# Altium PCB HVP012A.PcbDoc (part 1 of 3)
Units mil, origin at the board's own origin, x right, y up, seen from the top; angles counter-clockwise.
Board outline 2249 x 2178 mil, 4 copper layers (Top Layer, MidLayer1, MidLayer2, Bottom Layer), stack 61.2 mil thick; 91 components, 29 nets, 189 pads, 191 vias.
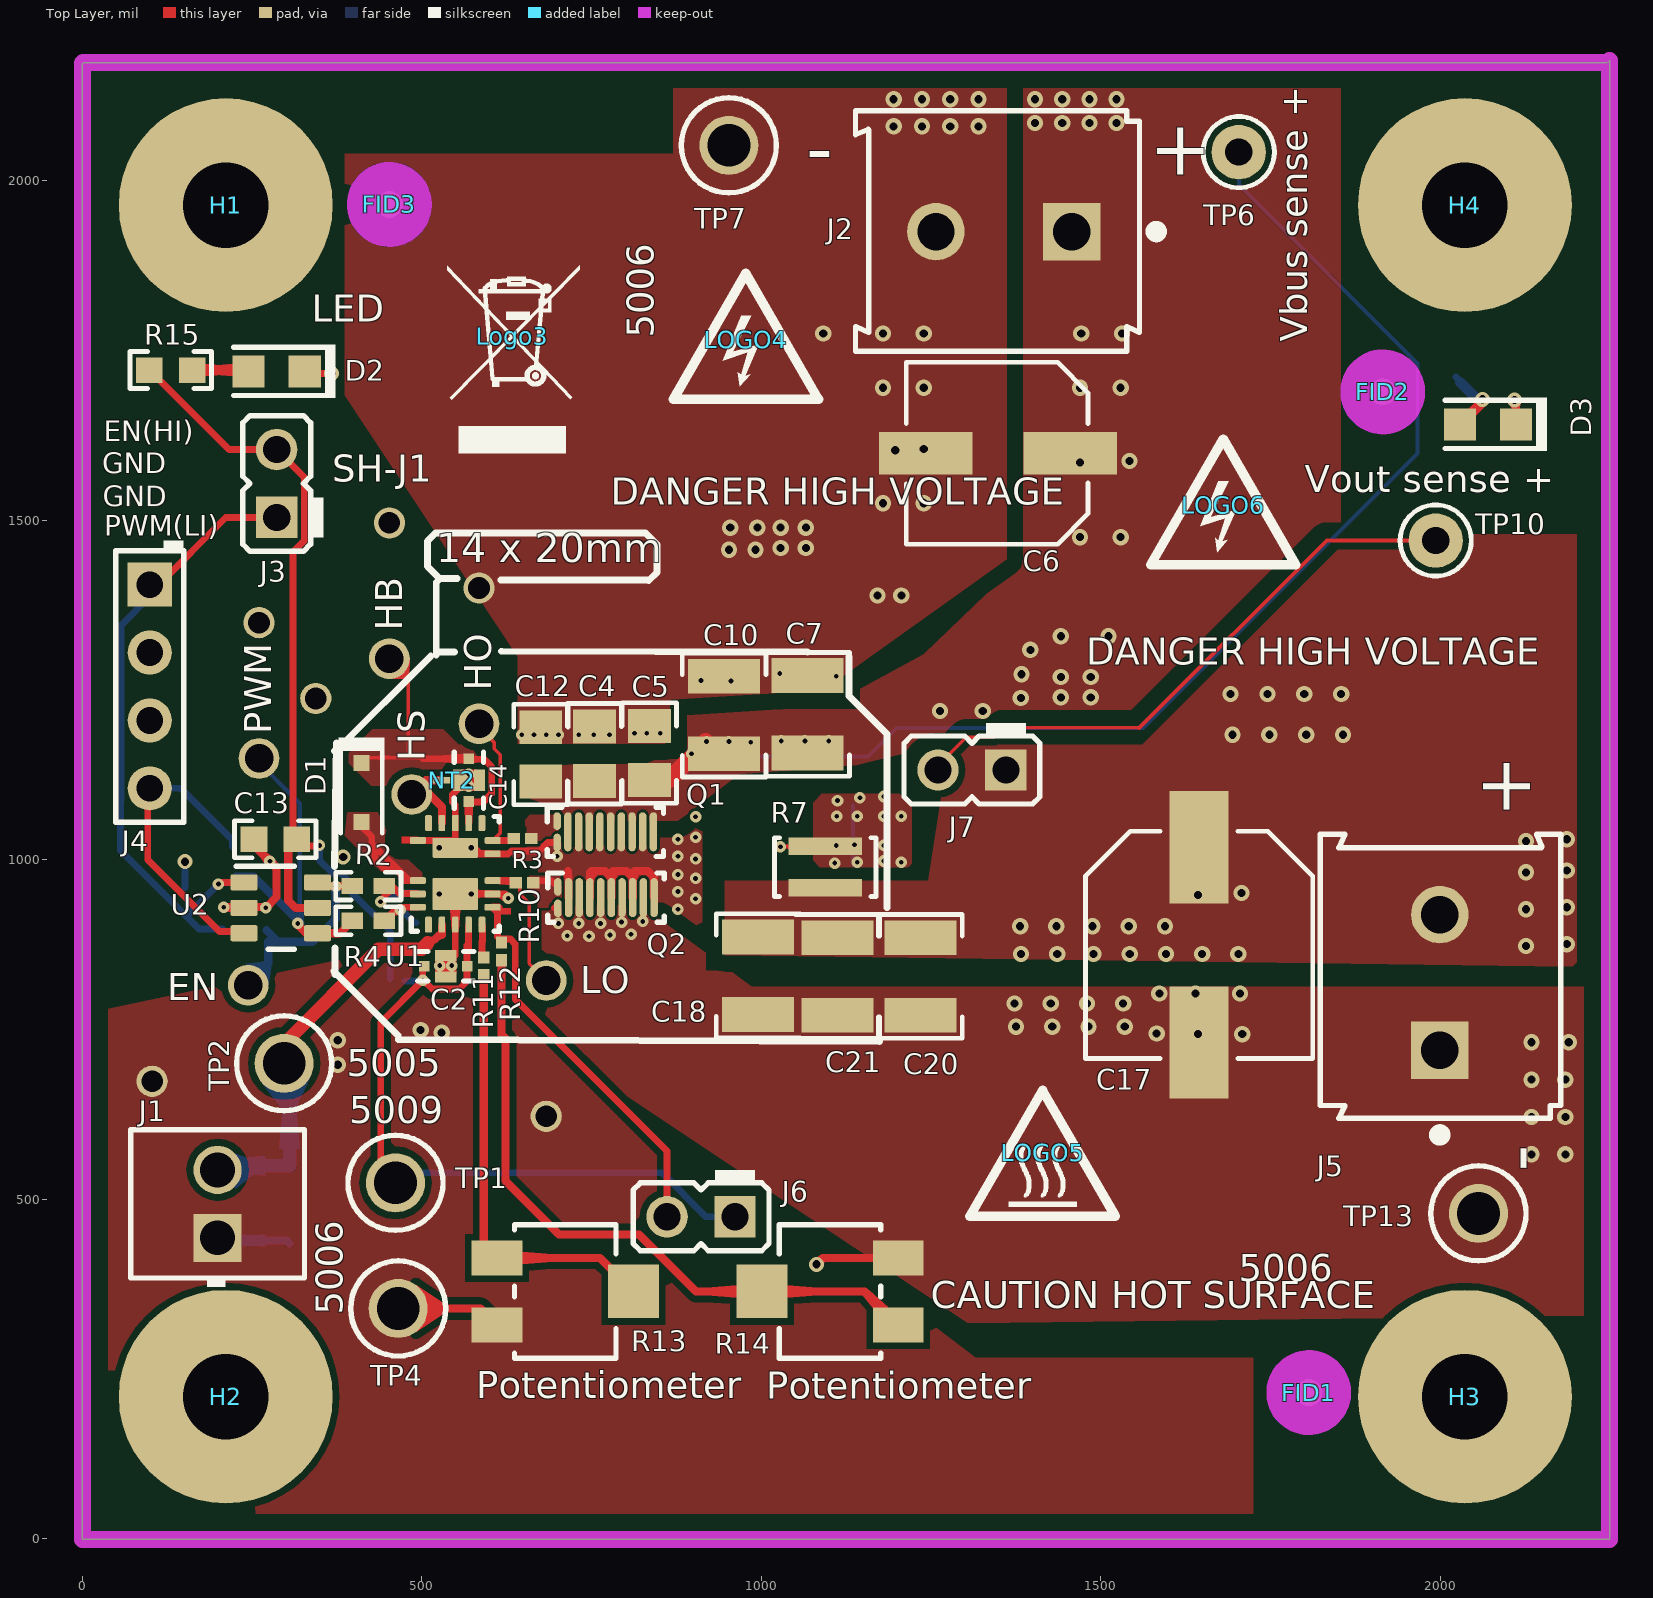
[diagram p0: Top Layer view]
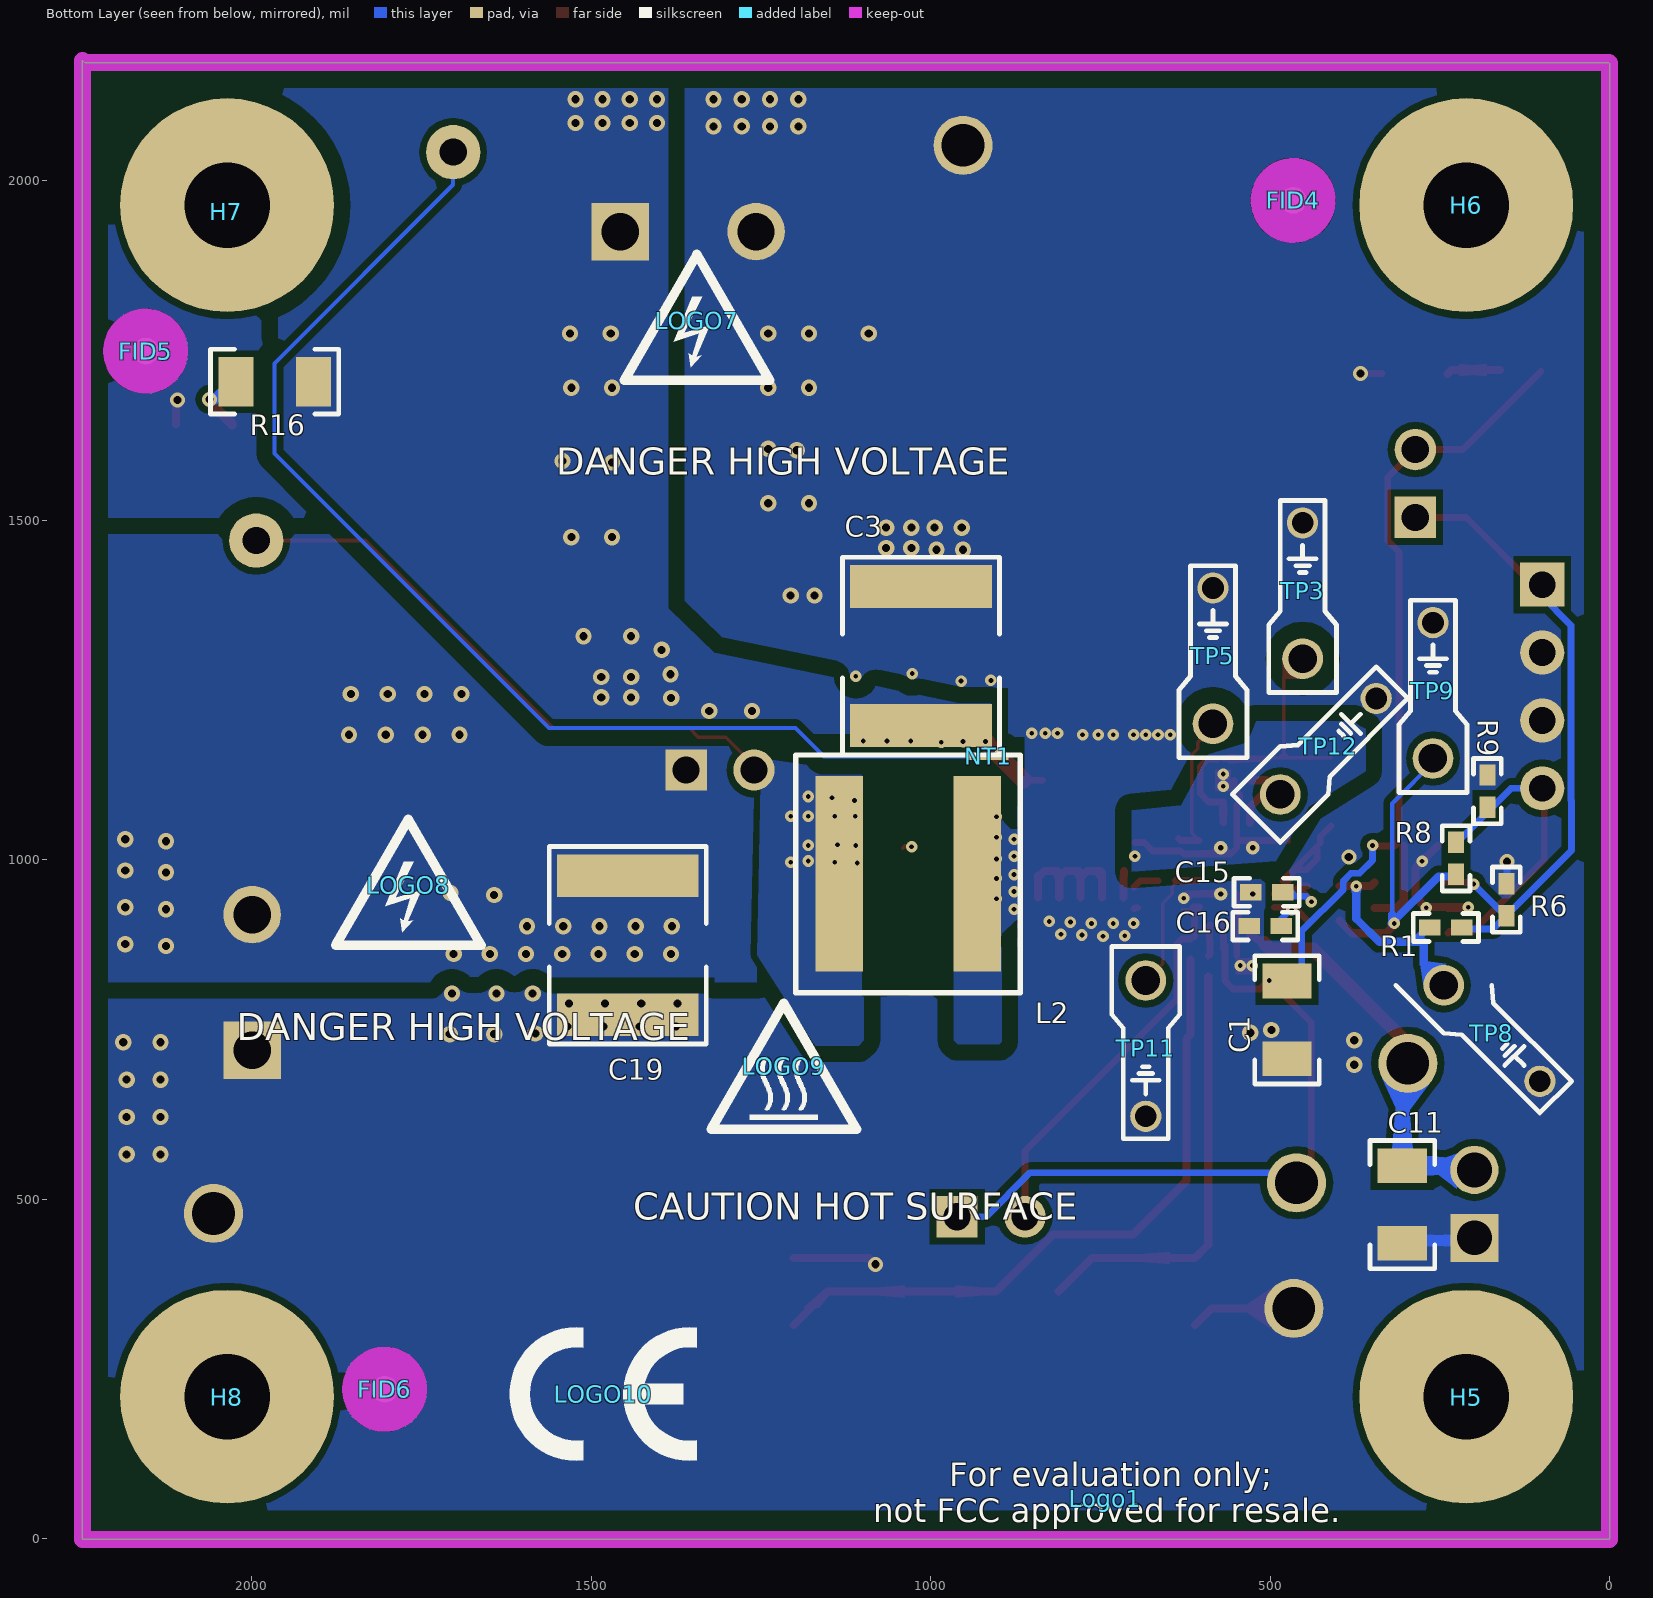
[diagram p1: Bottom Layer view, seen from below]
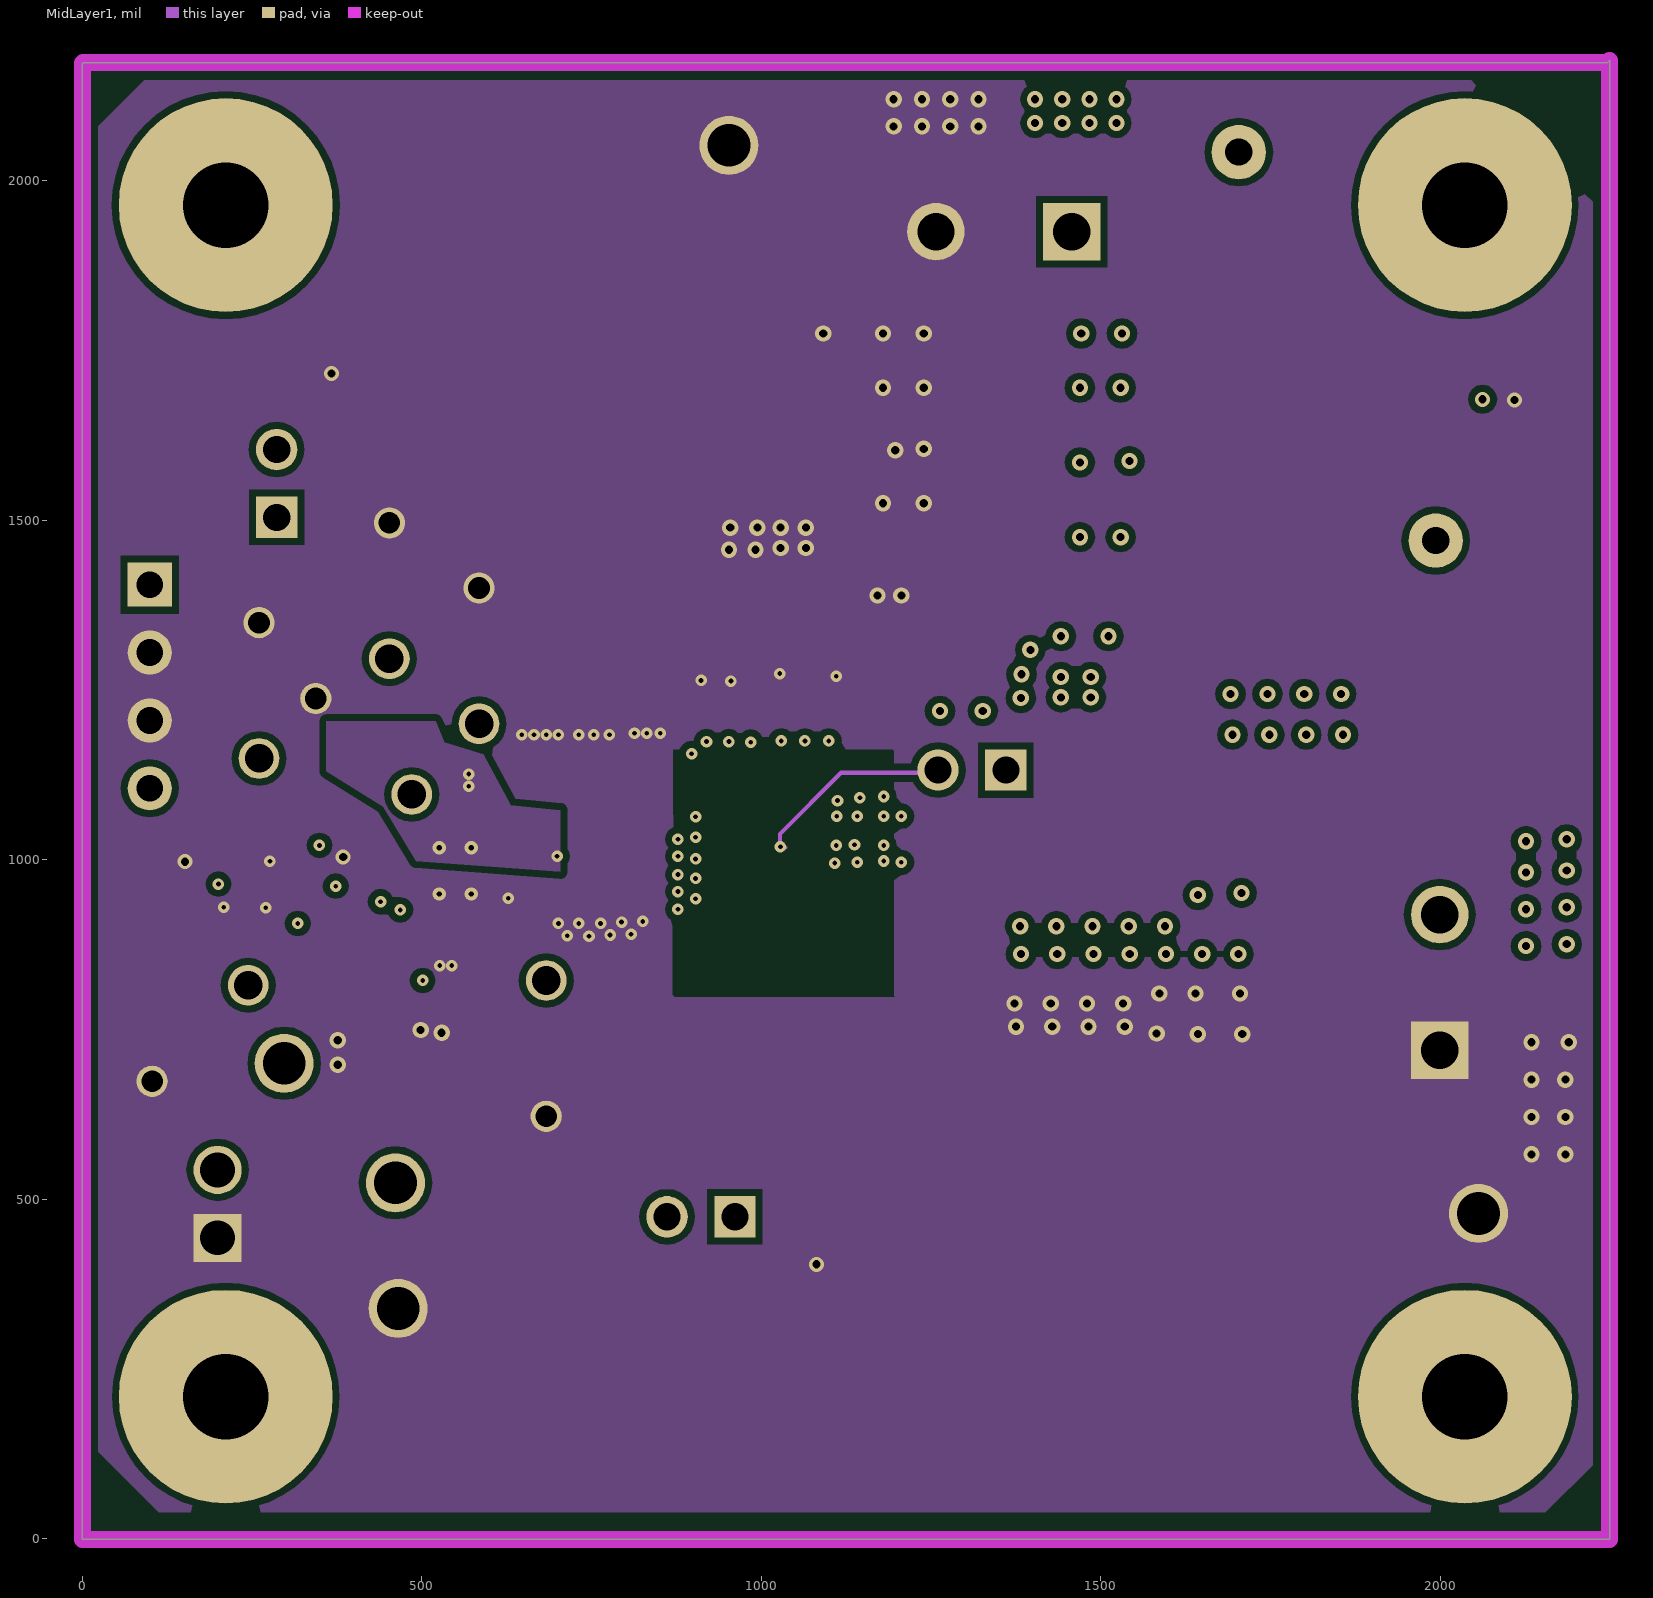
[diagram p2: MidLayer1]
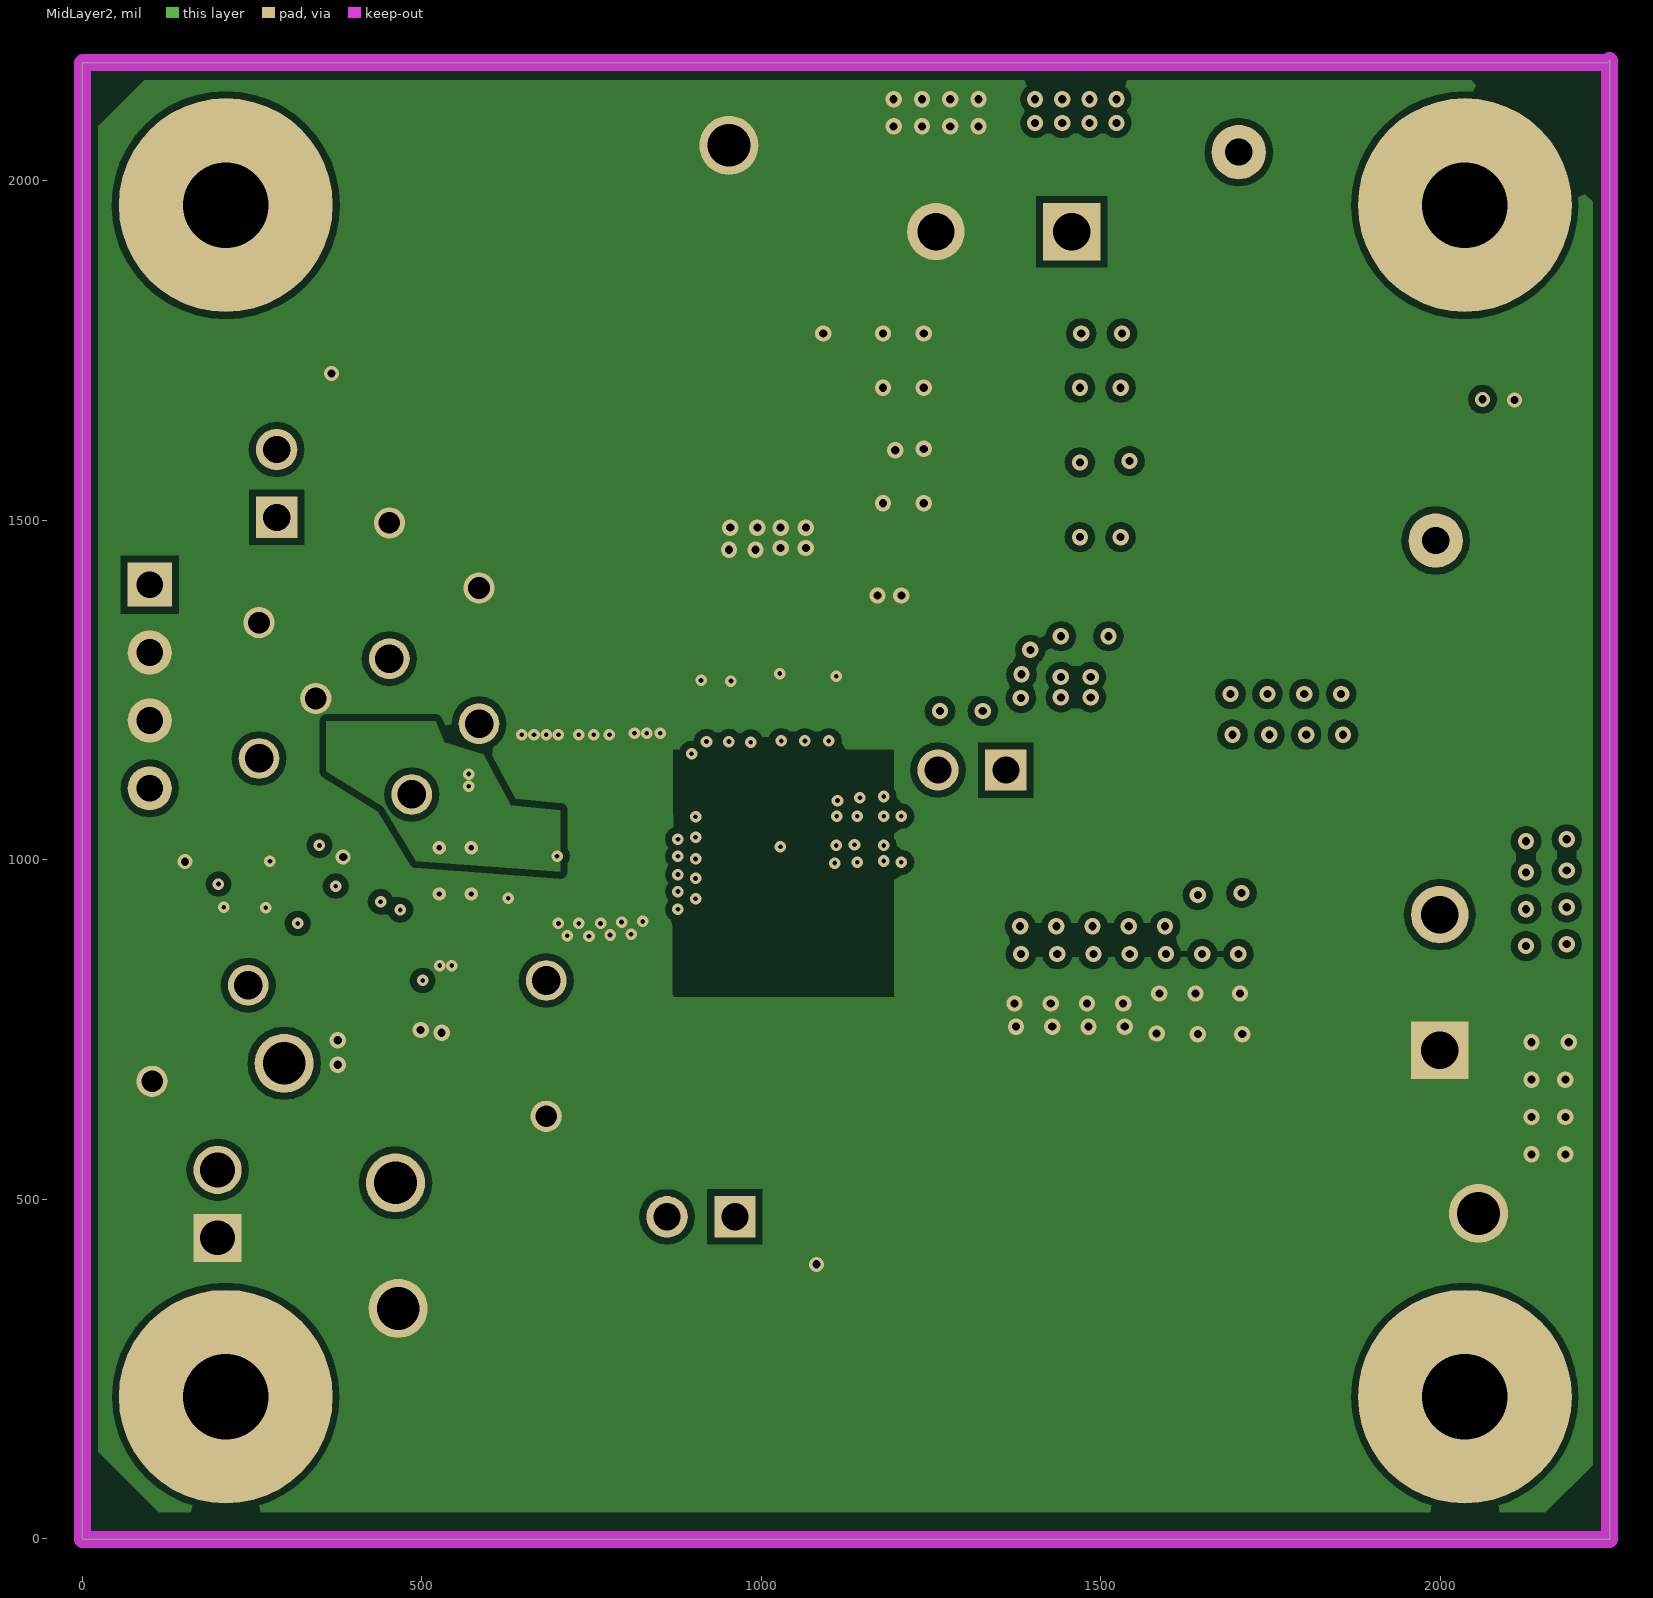
[diagram p3: MidLayer2]

## Layer stack, top to bottom
Top Solder: solder mask 0.4, Solder Resist, Dk 3.5
Top Layer: signal copper 2.8
Dielectric1: core 5, FR-4, Dk 4.2
MidLayer1: signal copper 2.8
Dielectric2: core 40, FR-4, Dk 4.2
MidLayer2: signal copper 2.8
Dielectric 3: prepreg 5, Dk 4.2
Bottom Layer: signal copper 2.8
Bottom Solder: solder mask 0.4, Solder Resist, Dk 3.5

## Board outline
0,-1 0,2173 1,2174 2246,2174 2249,2177 2249,-1

## Design rules (kind name [scope] priority, off if disabled: settings)
AcuteAngle [All] p1: minimum=3.20000000000000E+0001 checktracksonly=FALSE
AssemblyTestPointUsage [All] p1: valid=2
Clearance Fiducials [HasFootprint('Fiducial10-30')] p1: gap=0 ignorepadtopadclearanceinfootprint=FALSE
Clearance "inner layer clearance" [OnLayer('MidLayer1')or OnLayer('MidLayer2')] p2: gap=10 ignorepadtopadclearanceinfootprint=FALSE except(0: Arc-Hole Track-Hole SMDPad-Hole THPad-Hole Via-Hole Fill-Hole Poly-Hole Region-Hole Text-Hole)
Clearance Clearance_BoardEdge_Poly [OnCopper and InPoly vs IsKeepOut] p3: gap=25 ignorepadtopadclearanceinfootprint=FALSE except(0: Arc-Hole Track-Hole SMDPad-Hole THPad-Hole Via-Hole Fill-Hole Poly-Hole Region-Hole Text-Hole)
Clearance Clearance_BoardEdge [OnCopper and Not InComponentClass('Logo') and not InComponentClass('FiducialMark') and not InRegion(1000,500,4000,800) and Not OnLayer('Keepout') vs OnLayer('Keepout')] p4: gap=60 ignorepadtopadclearanceinfootprint=FALSE except(0: Arc-Hole Track-Hole SMDPad-Hole THPad-Hole Via-Hole Fill-Hole Poly-Hole Region-Hole Text-Hole)
Clearance Clearance_BoardEdge_MountingHoles [OnCopper and InComponentClass('Mounting Holes') vs IsKeepOut] p5: gap=40 ignorepadtopadclearanceinfootprint=FALSE except(0: Arc-Hole Track-Hole SMDPad-Hole THPad-Hole Via-Hole Fill-Hole Poly-Hole Region-Hole Text-Hole)
Clearance "FET pads clearance" [All vs WithinRoom('FETs')] p6: gap=4 ignorepadtopadclearanceinfootprint=FALSE except(0: Arc-Hole Track-Hole SMDPad-Hole THPad-Hole Via-Hole Fill-Hole Poly-Hole Region-Hole Text-Hole)
Clearance SW [InNetClass('SW') vs not InNetClass('SW')] p7: gap=24 ignorepadtopadclearanceinfootprint=FALSE except(0: Arc-Hole Track-Hole SMDPad-Hole THPad-Hole Via-Hole Fill-Hole Poly-Hole Region-Hole Text-Hole)
Clearance HV [InNetClass('HV') vs not InNetClass('HV')] p8: gap=24 ignorepadtopadclearanceinfootprint=FALSE except(0: Arc-Hole Track-Hole SMDPad-Hole THPad-Hole Via-Hole Fill-Hole Poly-Hole Region-Hole Text-Hole)
Clearance HV2 [InNetClass('HV2') vs not InNetClass('HV2')] p9: gap=24 ignorepadtopadclearanceinfootprint=FALSE except(0: Arc-Hole Track-Hole SMDPad-Hole THPad-Hole Via-Hole Fill-Hole Poly-Hole Region-Hole Text-Hole)
Clearance Clearance_Poly [InPolygon] p10: gap=10 ignorepadtopadclearanceinfootprint=FALSE except(0: Arc-Hole Track-Hole SMDPad-Hole THPad-Hole Via-Hole Fill-Hole Poly-Hole Region-Hole Text-Hole)
Clearance Clearance_1 [All] p11: gap=5 ignorepadtopadclearanceinfootprint=FALSE except(0: Arc-Hole Track-Hole SMDPad-Hole THPad-Hole Via-Hole Fill-Hole Poly-Hole Region-Hole Text-Hole)
ComponentClearance [InComponent('SH-J1')] p1: gap=0 collisioncheckmode=3 verticalgap=0 showdistances=FALSE
ComponentClearance "Schematic ComponentClearance1" [InComponent('NT1')] p2: gap=0 collisioncheckmode=3 verticalgap=0 showdistances=FALSE
ComponentClearance "Schematic ComponentClearance2" [InComponent('NT2')] p3: gap=0 collisioncheckmode=3 verticalgap=0 showdistances=FALSE
ComponentClearance ComponentClearance_ScrewToNut [(HasFootprint('NY PMS 440 0025 PH')) vs (HasFootprint('Keystone_1902C'))] p4: gap=0 collisioncheckmode=3 verticalgap=0 showdistances=FALSE
ComponentClearance ComponentClearance_testpoint [(HasFootprint('TESTPOINT_PIGTAIL'))] p5: gap=0 collisioncheckmode=3 verticalgap=0 showdistances=FALSE
ComponentClearance not_comp_1 [WithinRoom('not_comp')] p6: gap=0 collisioncheckmode=3 verticalgap=0 showdistances=FALSE
ComponentClearance ComponentClearance_1 [All] p7: gap=10 collisioncheckmode=3 verticalgap=10 showdistances=FALSE
ComponentClearance ComponentClearance_Shunt [InComponentClass('Header') vs InComponentClass('Shunt')] p8: gap=0 collisioncheckmode=3 verticalgap=0 showdistances=FALSE
ComponentClearance ComponentClearance_Logo [InComponentClass('Logo')] p9: gap=50 collisioncheckmode=3 verticalgap=10 showdistances=FALSE
ComponentClearance ComponentClearance_MountingHoles [InComponentClass('Mounting Holes')] p10: gap=0 collisioncheckmode=3 verticalgap=100000 showdistances=FALSE
ComponentClearance ComponentClearance_SmallPassives [HasFootprint('0201*') or HasFootprint('0402*') or HasFootprint('0508') or HasFootprint('0603*') or HasFootprint('0612') or HasFootprint('0805*') or HasFootprint('0815*') or HasFootprint('0830*') or HasFootprint('1206*') or HasFootprint('1210*') or HasFootprint('1808*') or HasFootprint('1812*') or HasFootprint('1825*') or HasFootprint('2010*') or HasFootprint('2220*') or HasFootprint('2225*') or HasFootprint('2512*') or HasFootprint('2728*') or HasFootprint('3518*') vs HasFootprint('0201*') or HasFootprint('0402*') or HasFootprint('0508') or HasFootprint('0603*') or HasFootprint('0612') or HasFootprint('0805*') or HasFootprint('0815*') or HasFootprint('0830*') or HasFootprint('1206*') or HasFootprint('1210*') or HasFootprint('1808*') or HasFootprint('1812*') or HasFootprint('1825*') or HasFootprint('2010*') or HasFootprint('2220*') or HasFootprint('2225*') or HasFootprint('2512*') or HasFootprint('2728*') or HasFootprint('3518*')] p11: gap=5 collisioncheckmode=3 verticalgap=10 showdistances=FALSE
ComponentClearance ComponentClearance_THtoSMT [IsThruComponent vs IsSMTComponent] p12: gap=40 collisioncheckmode=3 verticalgap=30 showdistances=FALSE
ComponentClearance ComponentClearance_THtoTH [IsThruComponent vs IsThruComponent] p13: gap=118.11 collisioncheckmode=3 verticalgap=30 showdistances=FALSE
DiffPairsRouting [All] p1: maxlimit=100 minlimit=10 mostfreqgap=10 toplayer_minwidth=15 toplayer_maxwidth=15 toplayer_prefwidth=15 midlayer1_minwidth=15 midlayer1_maxwidth=15 midlayer1_prefwidth=15 midlayer2_minwidth=15 midlayer2_maxwidth=15 midlayer2_prefwidth=15 bottomlayer_minwidth=15 bottomlayer_maxwidth=15 bottomlayer_prefwidth=15 maxuncoupledlength=1000
FabricationTestPointUsage TestPointUsage [All] p1: valid=2 allowmultiple=FALSE
FabricationTestpoint Testpoint [All] p1: side=3 testpointundercomponent=TRUE minsize=40 maxsize=100 preferedsize=60 minholesize=0 maxholesize=40 preferedholesize=32 testpointgrid=1 allowsidetop=TRUE allowsidebottom=TRUE usegrid=TRUE gridtolerance=0.01
FanoutControl Fanout_LCC [IsLCC] p1: bgadir=Out bgaviamode=Centered fanoutstyle=Auto fanoutdirection=Alternating viagrid=1 // Fanout_LCC (Default Rule)
FanoutControl Fanout_BGA [IsBGA] p2: bgadir=Out bgaviamode=Centered fanoutstyle=Auto fanoutdirection=Alternating viagrid=1 // Fanout_BGA (Default Rule)
FanoutControl Fanout_Default [All] p4: bgadir=Out bgaviamode=Centered fanoutstyle=Auto fanoutdirection=Alternating viagrid=1 // Fanout_Default (Default Rule)
FanoutControl Fanout_Small [(CompPinCount < 5)] p5: bgadir=Out bgaviamode=Centered fanoutstyle=Auto fanoutdirection=OutThenIn viagrid=1 // Fanout_Small (Default Rule)
HoleSize [All] p1: absolutevalues=TRUE maxlimit=251 minlimit=7 maxpercent=80.000 minpercent=20.000
HoleToHoleClearance [All] p1: gap=6 allowstackedmicrovias=TRUE
MinimumAnnularRing MinimumAnnularRing_ThermalPadVias [IsVia and InAnyComponent] p1: minimumring=5
MinimumAnnularRing [All] p2: minimumring=5
MinimumSolderMaskSliver MinimumSolderMaskSliver_Logo [InComponentClass('Logo') vs InComponentClass('Logo')] p1: minsoldermaskwidth=0.7
MinimumSolderMaskSliver [All] p2: minsoldermaskwidth=1
PlaneConnect [All] p1: planeconnectstyle=Direct reliefexpansion=10 reliefentries=4 reliefconductorwidth=10 reliefairgap=10
PolygonConnect [All] p1: connectstyle=Direct reliefconductorwidth=10 reliefentries=4 polygonreliefangle="90 Angle" airgapwidth=10
RoomDefinition FETs [InComponent('No Component')] p1: confinementstyle=ConfineIn formatcopy=TRUE lockcomponents=FALSE outline 636,1077 646,1077 646,873 921,873 921,1076
RoutingVias ThermalPadVias [IsVia and InAnyComponent] p1: holewidth=7.87 width=19.68 viastyle="Through Hole" minholewidth=7 minwidth=19.68 maxholewidth=12.99 maxwidth=23.62
RoutingVias [All] p2: holewidth=16 width=18 viastyle="Through Hole" minholewidth=6.99 minwidth=13 maxholewidth=40 maxwidth=65
SMDToCorner [All] p1: distance=30000
SilkToSilkClearance [All] p1: silktosilkclearance=2
SilkToSolderMaskClearance SilkscreenOverComponentPads [IsPad] p1: minsilkscreentomaskgap=2 clearancetoexposedcopper=TRUE
SolderMaskExpansion [All] p1: expansion=1.97
Width [All] p1: maxlimit=200 minlimit=3 preferedwidth=6 checkconnectedcopper=TRUE
15 further rules are at their usual default settings.

## Classes and differential pairs
net class HV: K_VIN VIN
net class SW: 11 15 HB2 HGATE HO HS2 NetNT2_1
net class HV2: NetJ7_2 VOUT

## Components (designator, comment, footprint, x,y, rotation, side; value= is the part's Value field where it differs from the comment)
C1 "Capacitor" 1206 475,764 r270 bottom value=10uF
C2 "Capacitor_Balanced" YFF18PW 535,843 r0 top value=0.47uF
C3 "Capacitor" 2220_200 1014,1300 r90 bottom value=1uF
C4 "Capacitor" 0805_HV 754,1156 r90 top value=0.022uF
C5 "Capacitor" 0805_HV 835,1157 r90 top value=0.022uF
C6 "Cap_Polarized" CAPSMT_62_F60 1349,1599 r180 top value=22uF
C7 "Capacitor" 1210_220 1068,1214 r90 top value=0.22uF
C10 "Capacitor" 1210_220 945,1213 r90 top value=0.22uF
C11 "Capacitor" 1206 305,492 r90 bottom value=10uF
C12 "Capacitor" 0805_HV 675,1155 r90 top value=0.022uF
C13 "Capacitor" 0603 284,1030 r180 top value=0.1uF
C14 "Capacitor_Balanced" YFF18PW 569,1117 r90 top value=0.47uF
C15 "Capacitor" 0402 505,952 r180 bottom value=10pF
C16 "Capacitor" 0402 507,902 r0 bottom value=10pF
C17 "Cap_Polarized" CAPSMT_62_H70 1644,875 r270 top value=47uF
C18 "Capacitor" 1210_220 995,829 r270 top value=0.22uF
C19 "Capacitor" 2220_200 1446,874 r270 bottom value=1uF
C20 "Capacitor" 1210_220 1234,828 r270 top value=0.22uF
C21 "Capacitor" 1210_220 1112,828 r270 top value=0.22uF
D1 "BAT46WJ,115" SOD-323F 411,1099 r270 top value=100V
D2 "LED" LTST-C170KGKT_Green 286,1719 r0 top value=Green
D3 "green" LTST-C170KGKT_Green 2070,1641 r0 top value=Green
FID1 "Fiducial" Fiducial10-30 1806,215 r0 top
FID2 "Fiducial" Fiducial10-30 1915,1689 r0 top
FID3 "Fiducial" Fiducial10-30 452,1965 r0 top
FID4 "Fiducial" Fiducial10-30 466,1971 r180 bottom
FID5 "Fiducial" Fiducial10-30 2156,1749 r180 bottom
FID6 "Fiducial" Fiducial10-30 1804,220 r180 bottom
H1 "NY PMS 440 0025 PH" "NY PMS 440 0025 PH" 211,1964 r0 top
H2 "NY PMS 440 0025 PH" "NY PMS 440 0025 PH" 211,209 r0 top
H3 "NY PMS 440 0025 PH" "NY PMS 440 0025 PH" 2036,209 r0 top
H4 "NY PMS 440 0025 PH" "NY PMS 440 0025 PH" 2036,1964 r0 top
H5 "Nut" Keystone_1902C 211.18,208.51 r180 bottom
H6 "Nut" Keystone_1902C 211.18,1963.51 r180 bottom
H7 "Nut" Keystone_1902C 2037.18,1954.51 r180 bottom
H8 "Nut" Keystone_1902C 2036.18,208.51 r180 bottom
J1 "Receptacle_2x1" On-Shore_OSTVN02A150 199,493 r90 top
J2 "Receptacle_2x1" TEC_282841-2 1357,1925 r180 top
J3 "Header_2x1" Sullins_Gxx02SAAN 286,1554 r90 top
J4 "Header_4x1" TE_5-146278-4 99,1255 r270 top
J5 "Receptacle_2x1" TEC_282841-2 1999,819 r90 top
J6 "Header_2x1" Sullins_Gxx02SAAN 911,474 r180 top
J7 "Header_2x1" Sullins_Gxx02SAAN 1310,1132 r180 top
L2 "Inductor_Iron" XAL8080 1033,979 r0 bottom value=4.7uH
Logo1 "FCC disclaimer" FCC_disclaimer_stacked 742.47,58.47 r180 bottom
Logo3 "WEEE logo" WEEE_Minimum 633,1771 r0 top
LOGO4 "DANGER HIGH VOLTAGE" IEC_HighVoltage_Small 977,1766 r0 top
LOGO5 "CAUTION HOT SURFACE" IEC_HotSurface_Small 1414,568 r0 top
LOGO6 "DANGER HIGH VOLTAGE" IEC_HighVoltage_Small 1680,1522 r0 top
LOGO7 "DANGER HIGH VOLTAGE" IEC_HighVoltage_Small 1344,1794 r180 bottom
LOGO8 "DANGER HIGH VOLTAGE" IEC_HighVoltage_Small 1769,962 r180 bottom
LOGO9 "CAUTION HOT SURFACE" IEC_HotSurface_Small 1216,696 r180 bottom
LOGO10 "CE Mark" CE_Mark_5mm 1482,213 r180 bottom
NT1 "Net-Tie" Net-Tie_10milWide_30milLong 915,1152 r0 bottom net-tie
NT2 "Net-Tie" Net-Tie_10milWide_30milLong 544,1117 r0 top net-tie
Q1 "EPC2001C" EPC2001 770,1041 r0 top value=100V
Q2 "EPC2001C" EPC2001 771,944 r0 top value=100V
R1 "Resistor" 0402 241,900 r0 bottom value=0
R2 "Resistor" 0402 421,961 r0 top value=0
R3 "Resistor" 0201 648,1031 r0 top value=0
R4 "Resistor" 0402 421,910 r0 top value=0
R6 "Resistor" 0402 152,941 r270 bottom value=20.0k
R7 "PRL1632-R005-F-T1" 0612 1094,989 r270 top value=0.005
R8 "Resistor" 0402 226,1002 r270 bottom value=0
R9 "Resistor" 0402 180,1101 r270 bottom value=20.0k
R10 "Resistor" 0201 651,966 r0 top value=0
R11 "Resistor" 0201 591,843 r90 top value=20.0k
R12 "Resistor" 0201 617,865 r90 top value=20.0k
R13 "Potentiometer" TRIM_3224X 711,364 r0 top value=1M
R14 "Potentiometer" TRIM_3224X 1101,364 r180 top value=1M
R15 "Resistor" 0603 130,1721 r0 top value=1.0k
R16 "Resistor" 1206 1966,1704 r0 bottom value=100k
SH-J1 "SNT-100-BK-G" SNT-100-BK-G 287,1546 r90 top value=1x2
TP1 "5009" Keystone5009 461,524 r0 top
TP2 "5005" Keystone5005 297,700 r0 top
TP3 "HB" TESTPOINT_PIGTAIL 452,1296 r0 bottom
TP4 "5006" Keystone5006 465,339 r0 top
TP5 "HO" TESTPOINT_PIGTAIL 584,1200 r0 bottom
TP6 "Vbus sense +" Keystone5000 1703,2042 r0 top
TP7 "5006" Keystone5006 952,2052 r90 top
TP8 "EN" TESTPOINT_PIGTAIL 244,815 r135 bottom
TP9 "PWM" TESTPOINT_PIGTAIL 260,1149 r0 bottom
TP10 "Vout sense +" Keystone5000 1993,1470 r0 top
TP11 "LO" TESTPOINT_PIGTAIL 683,822 r180 bottom
TP12 "HS" TESTPOINT_PIGTAIL 485,1096 r45 bottom
TP13 "5006" Keystone5006 2056,479 r90 top
U1 "LMG1210" RVR0019A 549,979 r90 top
U2 "SN74LVC2G17DBVR" DBV0006A_N 292,929 r0 top
ZZ2 "These assemblies are ESD sensitive, ESD precautions shall be observed." AssemblyNote -714,3598.11 r0 top
ZZ3 "These assemblies must be clean and free from flux and all contaminants. Use of no clean flux is not acceptable." AssemblyNote -714,3509.56 r0 top
ZZ4 "These assemblies must comply with workmanship standards IPC-A-610 Class 2, unless otherwise specified." AssemblyNote -714,3421 r0 top

## Footprints (in the part's own frame and the unit in brackets; to place one, negate y for a bottom-side part, rotate by r counter-clockwise, add the part's x,y. Pads: shape width x height; smd on the part's side, far side on the other; paste and mask are expansions set on the pad)
0201 [mm] "Data from Kemet datasheet CC101_COM dated 7/28/11"
  rect 0.46x0.42 smd mask+0.048: 1(-0.33,0) 2(0.33,0)
  body extent -0.31,-0.16 0.31,0.16, height 0.26
0402 [mm] "0402 from SM-752 data"
  rect 0.8x0.6 smd: 1(-0.6,0) 2(0.6,0)
  silkscreen extent -1.22,-0.52 1.22,0.52, body extent -0.55,-0.3 0.55,0.3, height 0.6
0603 [mm] "0603 from SM-752 data"
  rect 1x0.95 smd: 1(-0.8,0) 2(0.8,0)
  silkscreen extent -1.52,-0.69 1.52,0.69, body extent -0.87,-0.47 0.87,0.47, height 1
0612 [mm] "Panasonic recommended land pattern, fb97d03ed01.pdf dated April 2008"
  rect 0.65x2.75 smd: 1(-0.775,0) 2(0.775,0)
  silkscreen extent -1.1,-1.9 1.1,1.9, body extent -0.9,-1.7 0.9,1.7, height 0.85
0805_HV [mil] "0805 with 30mil clearance between pads"
  rect 50x63 smd: 1(-40,0) 2(40,0)
  silkscreen extent -74,-40 74,40, body extent -43,-29 43,29, height 57
1206 [mm] "1206 from SM-752 data"
  rect 1.3x1.85 smd: 1(-1.45,0) 2(1.45,0)
  silkscreen extent -2.4,-1.21 2.4,1.21, body extent -1.7,-0.9 1.7,0.9, height 1.35
1210_220 [mm] "1210"
  rect 1.3x2.7 smd: 1(-1.45,0) 2(1.45,0)
  silkscreen extent -2.32,-1.57 2.32,1.57, body extent -1.7,-1.35 1.7,1.35, height 2.2
2220_200 [mm] "Chip Capacitor, Body 5.7x5.0mm, IPC Medium Density"
  rect 1.6x5.3 smd: 1(-2.6,0) 2(2.6,0)
  silkscreen extent -3.69,-2.94 3.69,2.94, body extent -2.95,-2.62 2.95,2.62, height 1.35
AssemblyNote [mil] "Assembly Note"
CAPSMT_62_F60 [mm] "6.3 x 5.7mm:  Chemi-Con F60"
  rect 3.5x1.6 smd: 1(-2.688,0.012) 2(2.712,0.012)
  silkscreen extent -3.35,-3.39 3.45,3.41, body extent -3.39,-3.39 3.45,3.41, height 6
CAPSMT_62_H70 [mm] "8 x 6.7mm:  Chemi-Con H70"
  rect 4.2x2.2 smd: 1(-3.638,0.012) 2(3.662,0.012)
  silkscreen extent -4.24,-4.24 4.26,4.26, body extent -4.24,-4.24 4.26,4.26, height 7
CE_Mark_5mm [mil] "Minimum text height for CE Mark"
  silkscreen extent -138,-98 138,98
DBV0006A_N [mm] "SOT23, 6-Leads, Body 2.9x1.6mm, Pitch 0.95mm, Lead Span 2.8mm, IPC Medium Density"
  rrect17% 1x0.6 smd: 1(-1.375,0.95) 2(-1.375,0) 3(-1.375,-0.95) 4(1.375,-0.95) 5(1.375,0) 6(1.375,0.95)
  silkscreen extent -1.68,-1.55 0.5,1.55, body extent -1.42,-1.46 1.42,1.46, height 1.12
EPC2001 [mm] "SMD, 11-Leads, Body 4.105x1.632mm, Pitch 0.4mm"
  oval 0.28x0.66 smd paste-0.05 mask-0.05: 1(-1.8,0.401) 2(-1.8,-0.401)
  oval 0.28x1.462 smd paste-0.05 mask-0.05: 3(-1.4,0) 4(-1,0) 5(-0.6,0) 6(-0.2,0) 7(0.2,0) 8(0.6,0) 9(1,0) 10(1.4,0) 11(1.8,0)
  silkscreen extent -2.18,-0.92 2.17,0.92, body extent -2.07,-0.83 2.07,0.83, height 0.82
FCC_disclaimer_stacked [mil]
Fiducial10-30 [mm]
  round 1 smd mask+1: 1(0,0)
  Top Layer keep-out circle w1.678: c0,0 r0.75
IEC_HighVoltage_Small [mil]
  silkscreen extent -107,-88 107,97
IEC_HotSurface_Small [mil]
  silkscreen extent -107,-93 107,92
Keystone5000 [mil] "For Keystone 500x miniature loop terminals"
  round 80 hole 40: 1(0,0)
  silkscreen extent -52,-52 52,52, body extent -49,-49 49,49, height 182
Keystone5005 [mil] "Keystone Compact loops"
  round 87 hole 63: 1(0,0)
  silkscreen extent -70,-70 70,70, body extent -63,-63 62,63, height 225
Keystone5006 [mil] "Keystone Compact loops"
  round 87 hole 63: 1(0,0)
  silkscreen extent -70,-70 70,70, body extent -63,-63 62,63, height 225
Keystone5009 [mil] "Keystone Compact loops"
  round 87 hole 63: 1(0,0)
  silkscreen extent -70,-70 70,70, body extent -63,-63 62,63, height 225
Keystone_1902C [mil] "Hex Standoff, 4-40 threaded, nylon"
  round 1 on Mech4: 0(0,0)
  body extent -145,-126 146,126, height 501
LTST-C170KGKT_Green [mm] "LITE-ON"
  rect 1.2x1.2 smd: 1(-1.05,0) 2(1.05,0)
  silkscreen extent -1.6,-1 2.2,1, body extent -1.05,-0.67 1.05,0.67, height 1.1
Net-Tie_10milWide_30milLong [mil] "10mil net tie, no solder mask opening, no solder paste"
  rect 30x10 smd paste-5 mask-5: 1(-15,0) 2(15,0)
"NY PMS 440 0025 PH" [mm] "4-40 nylon screw and mounting hole"
  round 8 hole 3.2: 1(0,0)
  body extent -3.3,-3.3 3.3,3.3, height 2.69
On-Shore_OSTVN02A150 [mm] "Terminal Block, 2.54mm, 2-pole, Brass, TH"
  rect 1.8x1.8 hole 1.3: 1(-1.27,0)
  round 1.8 hole 1.3: 2(1.27,0)
  silkscreen extent -3.1,-3.25 2.77,3.25, body extent -2.77,-3.25 2.77,3.25, height 8.51
RVR0019A [mm] "QFN, 19-Leads, Body 3x4mm, Pitch 0.5mm"
  rrect40% 0.6x0.25 smd: 1(-1.9,1) 2(-1.9,0.5) 3(-1.9,0) 4(-1.9,-0.5) 5(-1.9,-1) 11(1.9,-1) 12(1.9,-0.5) 13(1.9,0) 14(1.9,0.5) 15(1.9,1)
  rrect40% 0.25x0.6 smd: 6(-1.25,-1.4) 7(-0.75,-1.4) 8(-0.25,-1.4) 9(0.75,-1.4) 10(1.25,-1.4) 16(1.25,1.4) 17(-0.25,1.4) 18(-0.75,1.4) 19(-1.25,1.4)
  rrect13% 1.13x0.75 on Top Paste: 20(-0.75,-0.475) 20(-0.75,0.475)
  rrect8% 1.2x1.7 smd paste-1.7: 20(-0.75,0)
  rrect13% 0.71x0.75 on Top Paste: 21(0.975,-0.475) 21(0.975,0.475)
  rrect13% 0.75x1.7 smd paste-1.7: 21(0.975,0)
  silkscreen extent -2.15,-1.65 2.15,1.65, body extent -2,-1.5 2,1.5, height 0.8
SNT-100-BK-G [mil] "Samtec STEP model"
  round 1 on Mech3: 0(0,0)
  body extent -100,-50 100,50, height 344
SOD-323F [mm] "NXP recommended land pattern"
  rect 0.6x0.6 smd paste-0.05: 1(-1.1,0) 2(1.1,0)
  silkscreen extent -2.06,-0.86 1.53,0.86, body extent -1.35,-0.67 1.35,0.68, height 0.79
Sullins_Gxx02SAAN [mm] "Header, 2.54 mm, 2x1, TH"
  rect 1.55x1.55 hole 1.016: 1(-1.27,0)
  round 1.55 hole 1.016: 2(1.27,0)
  silkscreen extent -2.54,-1.75 2.54,1.27, body extent -2.54,-1.27 2.54,1.27, height 8.38
TE_5-146278-4 [mm] "TE CONNECTIVITY"
  rect 1.65x1.65 hole 1: 1(-3.81,0)
  round 1.65 hole 1: 2(-1.27,0) 3(1.27,0) 4(3.81,0)
  silkscreen extent -5.46,-1.27 5.08,1.27, body extent -4.95,-1.17 4.95,1.17, height 8.13
TEC_282841-2 [mm] "TE Connectivity"
  rect 2.15x2.15 hole 1.4: 1(-2.54,0)
  round 2.15 hole 1.4: 2(2.54,0)
  silkscreen extent -5.9,-4.52 5.55,4.47, body extent -5.08,-4.52 5.58,4.48, height 15.2
TESTPOINT_PIGTAIL [mil] "Pigtail"
  round 60 hole 42: 1(0,0)
  round 46 hole 32: 2(0,-200)
  silkscreen extent -50,-233 50,50
TRIM_3224X [mm] "Bourns"
  rect 1.9x1.3 smd: 1(-2.55,1.25) 3(-2.55,-1.25)
  rect 1.9x2 smd: 2(2.55,0)
  silkscreen extent -1.9,-2.5 1.9,2.5, body extent -1.8,-2.4 1.8,2.4, height 5.31
WEEE_Minimum [mil] "WEEElie bin"
  silkscreen extent -95,-172 99,104
XAL8080 [mm] "Coilcraft"
  rect 1.78x7.31 smd: 1(-2.58,0) 2(2.58,0)
  silkscreen extent -4.2,-4.45 4.2,4.45, body extent -4.15,-4.4 4.15,4.4, height 8
YFF18PW [mm] "TDK"
  rect 0.4x0.4 smd: 1(-0.8,0) 2(0.8,0)
  rect 0.8x0.4 smd: 3(0,-0.4) 3(0,0.4)
  Top Layer region: -0.4,-0.3 0.4,-0.3 0.4,0.3 -0.4,0.3
  silkscreen extent -1.05,-0.55 1.05,0.55, body extent -0.85,-0.45 0.85,0.45, height 0.7

## Part data
C1 C11: library part CMP-0008574-2, "CAP, CERM, 10 uF, 25 V, +/- 10%, X7R, 1206", Cap_Case=1206, Manufacturer="Wurth Elektronik", PartNumber=885012208069, Supplier Part Number 1=732-7574-1-ND, TempCo=X7R, Tolerance_%=10%, Value1=Unknown, Value2=25V, ValueDisplayed=10uF, AEC Category=Q200, AEC Grade=N/A, AEC Qualified=N, Cap_F=10µF, ComponentLink1Description="Datasheet link", ComponentLink1URL=http://katalog.we-online.de/pbs/datasheet/885012208069.pdf, CompType=Capacitor, LatestRevisionDate=2017-03-09, MountType=SMT, PackageReference=1206, Polarized=N, Published=2008-06-19, Publisher="Texas Instruments", RoHS=Y, SizeArea_mm2=5.12, SizeAreaWB_mm2=10.92, SizeX_mm=3.2, SizeY_mm=1.6, SizeZ_mm=1.35, Supplier 1=Digi-Key, Supplier 2=Mouser, Supplier Part Number 2=710-885012208069, TaMax_C=125°C, TaMin_C=-55°C, Technology=Ceramic, U/M=EA, VDC_V=25V
C2 C14: library part CMP-0002107-2, "Feedthru Capacitor, 0.47uF, 6.3V, SMD", Manufacturer=TDK, PartNumber=YFF18PW0J474M, Supplier Part Number 1=445-3028-1-ND, ComponentLink1Description="Datasheet URL", ComponentLink1URL=http://product.tdk.com/en/catalog/datasheets/emc_esr_yff-p_en.pdf, CompType=Filter, LatestRevisionDate=09/03/2017, MountType=SMT, PackageReference=0603, Publisher="Texas Instruments", RoHS=Y, Supplier 1=Digi-Key, Supplier 2=Mouser, Supplier Part Number 2=810-CKD61BJB0J474S
C3 C19: library part CMP-0009465-2, "CAP, CERM, 1 uF, 250 V, +/- 10%, X7R, 2220", Cap_Case=2220, Manufacturer=MuRata, PartNumber=GRM55DR72E105KW01L, Supplier Part Number 1=490-3550-1-ND, TempCo=X7R, Tolerance_%=10%, Value1="0.007086 ohm", Value2=250V, ValueDisplayed=1uF, AEC Category=Q200, AEC Grade=N/A, AEC Qualified=N, Cap_F=1µF, ComponentLink1Description="Datasheet link", ComponentLink1URL=http://psearch.en.murata.com/capacitor/product/GRM55DR72E105KW01%23.pdf, CompType=Capacitor, ESR_Ohm=7.086m, IRMS_A=2.0605A, LatestRevisionDate=2017-03-09, MountType=SMT, PackageReference=2220, Polarized=N, Published=2008-06-19, Publisher="Texas Instruments", RoHS=Y, SizeArea_mm2=28.5, SizeAreaWB_mm2=53.9, SizeX_mm=5.7, SizeY_mm=5, SizeZ_mm=2, Supplier 1=Digi-Key, Supplier 2=Newark, Supplier 3=Mouser, Supplier Part Number 2=14T3417, Supplier Part Number 3=81-GRM55RR72E105K, TaMax_C=125°C, TaMin_C=-55°C, Technology=Ceramic, U/M=EA, VDC_V=250V
C4 C5 C12: library part CMP-0008410-2, "CAP, CERM, 0.022 uF, 250 V, +/- 10%, X7R, 0805", Cap_Case=0805, Manufacturer="Taiyo Yuden", PartNumber=QMK212B7223KG-T, Supplier Part Number 1=587-1272-1-ND, TempCo=X7R, Tolerance_%=10%, Value1=Unknown, Value2=250V, ValueDisplayed=0.022uF, AEC Category=Q200, AEC Qualified=?, Cap_F=22nF, ComponentLink1Description="Datasheet link", ComponentLink1URL=http://www.yuden.co.jp/ut/product/pdf/dhmk_e.pdf, CompType=Capacitor, LatestRevisionDate=2017-03-09, MountType=SMT, PackageReference=0805, Polarized=N, Published=2008-06-19, Publisher="Texas Instruments", RoHS=Y, SizeArea_mm2=2.5, SizeAreaWB_mm2=6.75, SizeX_mm=2, SizeY_mm=1.25, SizeZ_mm=1.45, Supplier 1=Digi-Key, Supplier 2=Newark, Supplier 3=Farnell, Supplier Part Number 2=77M8478, Supplier Part Number 3=1683685, TaMax_C=125°C, TaMin_C=-55°C, Technology=Ceramic, U/M=EA, VDC_V=250V
C6: library part CMP-0010616-1, "CAP, AL, 22 uF, 20 V, +/- 20%, 0.06 ohm, SMD", Cap_Case=F60, Manufacturer=Chemi-Con, PartNumber=APXH200ARA220MF60G, Supplier Part Number 1=565-3149-1-ND, Tolerance_%=20%, Value1="0.06 ohm", Value2=20V, ValueDisplayed=22uF, AEC Category=Q200, AEC Qualified=?, Cap_F=22µF, ComponentLink1Description="Datasheet link", ComponentLink1URL=http://www.chemi-con.co.jp/cgi-bin/CAT_DB/SEARCH/cat_db_al.cgi?e=e&j=p&pdfname=pxh, CompType=Capacitor, ESR_Ohm=0.06, IRMS_A=1.65A, LatestRevisionDate=2017-03-09, MountType=SMT, PackageReference=F60, Polarized=Y, Publisher="Texas Instruments", RoHS=Y, Series=PXH, SizeArea_mm2=46.24, SizeAreaWB_mm2=77.44, SizeX_mm=6.8, SizeY_mm=6.8, SizeZ_mm=6, Supplier 1=Digi-Key, Supplier 2=Mouser, Supplier Part Number 2=661-PXH20V220M, TaMax_C=125°C, TaMin_C=-55°C, Technology=AL, U/M=EA, VDC_V=20V
C7 C10 C18 C20 C21: library part CMP-0009193-2, "CAP, CERM, 0.22 uF, 250 V, +/- 10%, X7R, 1210", Cap_Case=1210, Manufacturer=MuRata, PartNumber=GRM32DR72E224KW01L, Supplier Part Number 1=490-3545-1-ND, TempCo=X7R, Tolerance_%=10%, Value1=Unknown, Value2=250V, ValueDisplayed=0.22uF, AEC Category=Q200, AEC Qualified=?, Cap_F=220nF, ComponentLink1Description="Datasheet link", ComponentLink1URL=http://search.murata.co.jp/Ceramy/PnsearchViewAction.do?HnOFG=ON&HnNFG=ON&SEL_CNT=50&sLang=en&sKey=GRM32DR72E224KW01L&x=9&y=9&search=startwith, CompType=Capacitor, LatestRevisionDate=2017-03-09, MountType=SMT, PackageReference=1210, Polarized=N, Published=2008-06-19, Publisher="Texas Instruments", RoHS=Y, SizeArea_mm2=8, SizeAreaWB_mm2=14.7, SizeX_mm=3.2, SizeY_mm=2.5, SizeZ_mm=2.2, Supplier 1=Digi-Key, Supplier 2=Mouser, Supplier 3=Farnell, Supplier Part Number 2=81-GRM32DR72E224KW01, Supplier Part Number 3=1828959, TaMax_C=125°C, TaMin_C=-55°C, Technology=Ceramic, U/M=EA, VDC_V=250V
C13: library part CMP-0007404-4, "CAP, CERM, 0.1 uF, 25 V, +/- 10%, X7R, 0603", Cap_Case=0603, Manufacturer=MuRata, PartNumber=GRM188R71E104KA01D, Supplier Part Number 1=490-1524-1-ND, TempCo=X7R, Tolerance_%=10%, Value1=Unknown, Value2=25V, ValueDisplayed=0.1uF, AEC Category=Q200, AEC Qualified=?, Cap_F=100nF, ComponentLink1Description="Datasheet link", ComponentLink1URL=http://search.murata.co.jp/Ceramy/PnsearchViewAction.do?HnOFG=ON&HnNFG=ON&SEL_CNT=50&sLang=en&sKey=GRM188R71E104KA01D&x=9&y=9&search=startwith, CompType=Capacitor, LatestRevisionDate=2017-03-09, MountType=SMT, PackageReference=0603, Polarized=N, Published=2008-06-19, Publisher="Texas Instruments", RoHS=Y, SizeArea_mm2=1.28, SizeAreaWB_mm2=4.68, SizeX_mm=1.6, SizeY_mm=0.8, SizeZ_mm=1, Supplier 1=Digi-Key, Supplier 2=Mouser, Supplier 3=Farnell, Supplier Part Number 2=81-GRM39X104K25, Supplier Part Number 3=1828899, TaMax_C=125°C, TaMin_C=-55°C, Technology=Ceramic, U/M=EA, VDC_V=25V
C15 C16: library part CMP-0006207-2, "CAP, CERM, 10 pF, 50 V, +/- 5%, C0G/NP0, 0402", Cap_Case=0402, Manufacturer="Johanson Technology", PartNumber=500R07S100JV4T, TempCo=C0G/NP0, Tolerance_%=5%, Value1=Unknown, Value2=50V, ValueDisplayed=10pF, AEC Category=Q200, AEC Qualified=?, Cap_F=10pF, ComponentLink1Description="Datasheet link", ComponentLink1URL=http://www.johansontechnology.com/images/stories/catalog/JTI_CAT_2012_MLCC_HighQ.pdf, CompType=Capacitor, LatestRevisionDate=2017-03-09, MountType=SMT, PackageReference=0402, Polarized=N, Published=2008-06-19, Publisher="Texas Instruments", RoHS=Y, SizeArea_mm2=0.5, SizeAreaWB_mm2=3, SizeX_mm=1, SizeY_mm=0.5, SizeZ_mm=0.6, TaMax_C=125°C, TaMin_C=-55°C, Technology=Ceramic, U/M=EA, VDC_V=50V
C17: library part CMP-0010617-1, "CAP, AL, 47 uF, 20 V, +/- 20%, 0.045 ohm, SMD", Cap_Case=H70, Manufacturer=Chemi-Con, PartNumber=APXH200ARA470MH70G, Supplier Part Number 1=565-3150-1-ND, Tolerance_%=20%, Value1="0.045 ohm", Value2=20V, ValueDisplayed=47uF, AEC Category=Q200, AEC Qualified=?, Cap_F=47µF, ComponentLink1Description="Datasheet link", ComponentLink1URL=http://www.chemi-con.co.jp/cgi-bin/CAT_DB/SEARCH/cat_db_al.cgi?e=e&j=p&pdfname=pxh, CompType=Capacitor, ESR_Ohm=0.045, IRMS_A=2A, LatestRevisionDate=2017-03-09, MountType=SMT, PackageReference=H70, Polarized=Y, Publisher="Texas Instruments", RoHS=Y, Series=PXH, SizeArea_mm2=72.25, SizeAreaWB_mm2=110.25, SizeX_mm=8.5, SizeY_mm=8.5, SizeZ_mm=7, Supplier 1=Digi-Key, Supplier 2=Mouser, Supplier Part Number 2=661-PXH20V470M, TaMax_C=125°C, TaMin_C=-55°C, Technology=AL, U/M=EA, VDC_V=20V
D1: library part CMP-0076946-1, "Diode, Schottky, 100 V, 0.25 A, SOD-323F", Manufacturer=Nexperia, Supplier Part Number 1=568-6017-1-ND, Value1=0.25A, Value2=0.85V, AEC Category=Q101, AEC Qualified=?, ComponentLink1Description="Datasheet link", ComponentLink1URL=http://www.nexperia.com/documents/data_sheet/BAT46WJ.pdf, CompType=Diode, Green_EU RoHS=Incomplete, Green_EU RoHS-2=Incomplete, Green_Lifecycle="Not Set", Green_REACh=Incomplete, Io_A=2.5dA, LatestRevisionDate=2017-07-25, MountType=SMT, PackageReference=SOD-323F, PartNumber=BAT46WJ,115, Published=2008-06-26, Publisher="Texas Instruments", RoHS=Y, SizeArea_mm2=3.125, SizeAreaWB_mm2=7.875, SizeX_mm=2.5, SizeY_mm=1.25, SizeZ_mm=0.8, Supplier 1=Digi-Key, Supplier 2=Newark, Supplier 3=Mouser, Supplier Part Number 2=81R1832, Supplier Part Number 3=771-BAT46WJ115, TJmax_C=150°C, Type=Schottky, U/M=EA, Vf_V=8.5dV, Vr_V=100V
D2 D3: library part CMP-0002888-1, "LED, Green, SMD", Color=Green, Manufacturer=Lite-On, PartNumber=LTST-C170KGKT, Supplier Part Number 1=160-1414-1-ND, Value1=W, Value2=2V, ComponentLink1Description="Datasheet link", ComponentLink1URL=http://optoelectronics.liteon.com/upload/download/DS22-2000-073/S_110_LTST-C170KGKT.pdf, CompType=LED, Io_A=20mA, LatestRevisionDate=2017-03-09, MountType=SMT, PackageReference=LED_0805, Published=2008-07-11, Publisher="Texas Instruments", RoHS=Y, Supplier 1=Digi-Key, Supplier 2=Mouser, Supplier Part Number 2=859-LTST-C170KGKT, Type=AlInGaP, U/M=EA, Vf_V=2V
FID1 FID2 FID3 FID4 FID5 FID6: library part CMP-0077181-1, "Fiducial mark.  There is nothing to buy or mount.", Manufacturer=N/A, ClassName=FiducialMark, CompType=Fiducial, MountType=N/A, PackageReference=N/A, PartNumber=N/A
H1 H2 H3 H4: library part CMP-0003617-1, "Machine Screw, Round, #4-40 x 1/4, Nylon, Philips panhead", Manufacturer="B&F Fastener Supply", Supplier Part Number 1=H542-ND, ClassName="Mounting Holes", ComponentLink1Description="Datasheet Link", ComponentLink1URL=http://www.fasnetdirect.com/refguide/Nylpanms.pdf, CompType=Hardware, Key="NY PMS 440 0025 PH", LatestRevisionDate=2017-03-09, MountType=N/A, PackageReference=Screw, PartNumber="NY PMS 440 0025 PH", Publisher="Texas Instruments", RoHS=Y, Supplier 1=Digi-Key
H5 H6 H7 H8: library part CMP-0003610-1, "Standoff, Hex, 0.5\"L #4-40 Nylon", Manufacturer=Keystone, PartNumber=1902C, Supplier Part Number 1=36-1902C-ND, ComponentLink1Description="Datasheet Link", ComponentLink1URL=http://www.keyelco.com/pdfs/M55-prod31.pdf, CompType=Hardware, Key=1902C, LatestRevisionDate=2017-03-09, MountType=N/A, PackageReference=Standoff, Publisher="Texas Instruments", RoHS=Y, Supplier 1=Digi-Key
J1: library part CMP-0075076-1, "Terminal Block, 2.54mm, 2x1, Brass, TH", Manufacturer="On-Shore Technology", PartNumber=OSTVN02A150, Supplier Part Number 1=ED10561-ND, CNHeader=False, ComponentLink1Description="Datasheet URL", ComponentLink1URL=http://www.on-shore.com/sites/default/files/manuals/ostvnxxa150.pdf, CompType="Terminal Block", CT=True, Green_EU RoHS=Incomplete, Green_EU RoHS-2=Incomplete, Green_Lifecycle="Not Set", Green_REACh=Incomplete, LatestRevisionDate=2017-07-12, MountType=TH, PackageReference="Terminal Block, 2.54mm, 2-pole, Brass, TH", Publisher="Texas Instruments", RoHS=Y, Supplier 1=Digi-Key
J2 J5: library part CMP-0054973-1, "Terminal Block, 2x1, 5.08mm, TH", Manufacturer="TE Connectivity", PartNumber=282841-2, Supplier Part Number 1=A98342-ND, CNHeader=FALSE, ComponentLink1Description="Datasheet URL", ComponentLink1URL=http://www.te.com/commerce/DocumentDelivery/DDEController?Action=srchrtrv&DocNm=282841&DocType=Customer+Drawing&DocLang=English, CompType="Terminal Block", CT=TRUE, Green_EU RoHS="Passed with Exemption", Green_EU RoHS-2=Incomplete, Green_Lifecycle=Active, Green_REACh=Passed, LatestRevisionDate=26/05/2017, MountType=TH, PackageReference=10.16x15.2x9mm, Publisher="Texas Instruments", RoHS=Y, Supplier 1=Digi-Key, Supplier 2=Newark, Supplier 3=Mouser, Supplier Part Number 2=12H8419, Supplier Part Number 3=571-2828412
J3 J6 J7: library part CMP-0054576-1, "Header, 2.54 mm, 2x1, Gold, TH", Manufacturer="Sullins Connector Solutions", PartNumber=GBC02SAAN, ClassName=Header, CNHeader=TRUE, ComponentLink1Description="Datasheet URL", ComponentLink1URL=http://www.sullinscorp.com/catalogs/111_PAGE110-111_.100_MALE_HDR.pdf, CompType=Header, CT=FALSE, LatestRevisionDate=26/05/2017, MountType=TH, PackageReference="Header, 2.54 mm, 2x1, TH", Publisher="Texas Instruments", RoHS=Y
J4: library part CMP-0054950-1, "Header, 100mil, 4x1, Tin, TH", Manufacturer="TE Connectivity", PartNumber=5-146278-4, Supplier Part Number 1=5-146278-4-ND, ClassName=Header, CNHeader=TRUE, ComponentLink1Description="Datasheet URL", ComponentLink1URL=http://www.te.com/commerce/DocumentDelivery/DDEController?Action=srchrtrv&DocNm=146278&DocType=Customer+Drawing&DocLang=English, CompType=Header, CT=FALSE, Green_EU RoHS=Passed, Green_EU RoHS-2=Incomplete, Green_Lifecycle=Active, Green_REACh=Passed, LatestRevisionDate=26/05/2017, MountType=TH, PackageReference="Header, 4x1, 100mil, TH", Publisher="Texas Instruments", RoHS=Y, Supplier 1=Digi-Key, Supplier 2=Newark, Supplier 3=Mouser, Supplier Part Number 2=40P2617, Supplier Part Number 3=571-5-146278-4
L2: library part CMP-0061062-1, "Inductor, Shielded, Composite, 4.7 uH, 10.5 A, 0.00889 ohm, SMD", Manufacturer=Coilcraft, PartNumber=XAL8080-472ME, Supplier Part Number 1=994-XAL8080-472MEB, Value1="0.00889 ohm", Value2=10.5A, ValueDisplayed=4.7uH, AEC Category=Q200, AEC Qualified=?, ComponentLink1Description="Datasheet link", ComponentLink1URL=http://www.coilcraft.com/pdfs/xal8080.pdf, CompType=Inductor, DCR_ohm=8.89m, Green_EU RoHS=Incomplete, Green_EU RoHS-2=Incomplete, Green_Lifecycle="Not Set", Green_REACh=Incomplete, Imax_A=10.5A, Ind_H=4.7µH, Irms="10.5A @ 20C rise", Isat="17.4A @ 20% inductance drop", LatestRevisionDate=2017-06-02, Material=Composite, MountType=SMT, PackageReference="8.1 x 8 x 8.6mm", Published=2008-06-26, Publisher="Texas Instruments", RoHS=Y, SizeArea_mm2=69.66, SizeAreaWB_mm2=107.06, SizeX_mm=8.1, SizeY_mm=8.6, SizeZ_mm=8, Supplier 1=Mouser, Supplier 2=Farnell, Supplier Part Number 2=2289135, Technology=Shielded
Logo1: library part CMP-0074847-1, "FCC_disclaimer", LatestRevisionDate=2017-07-06, Lib Reference=FCC_disclaimer, PartNumber="FCC disclaimer", Published=2009-03-03, Publisher="Texas Instruments"
Logo3: library part CMP-0074769-1, Lib Reference="WEEE logo", PartNumber="WEEE logo"
LOGO4 LOGO6 LOGO7 LOGO8: library part CMP-0074835-1, "IEC 61010-1 High Voltage Warning", LatestRevisionDate=2017-07-06, Lib Reference=IEC_HighVoltage, PartNumber="DANGER HIGH VOLTAGE", Published=2009-03-03, Publisher="Texas Instruments", SymbolCreator=a0412235, SymbolVersion=2011-08-22
LOGO5 LOGO9: library part CMP-0074837-1, "IEC 61010-1 Hot Surface Warning", LatestRevisionDate=2017-07-06, Lib Reference=IEC_HotSurface, PartNumber="CAUTION HOT SURFACE", Published=2009-03-03, Publisher="Texas Instruments", SymbolCreator=a0412235, SymbolVersion=2011-08-22
LOGO10: library part CMP-0074844-1, LatestRevisionDate=2017-07-06, Lib Reference="CE Mark", PartNumber="CE Mark", Published=2009-03-03, Publisher="Texas Instruments", SymbolCreator=a0412235
NT1 NT2: library part CMP-0078142-1, "Single point connection between nets.", Manufacturer=N/A, CompType=Net-Tie, MountType=SMT, PackageReference=N/A, PartNumber=N/A
Q1 Q2: library part CMP-0000972-2, "MOSFET, N-CH, 100 V, 36 A, 4.105x1.632mm", Alternate Manufacturer=None, Manufacturer=EPC, Supplier Part Number 1=917-1079-1-ND, Value2="7.5 nC", AEC Category=Q101, AEC Qualified=N, ChType=N, ClassName=FETs, ComponentLink1Description="Datasheet link", ComponentLink1URL=http://epc-co.com/epc/Portals/0/epc/documents/datasheets/epc2001c_datasheet.pdf, CompType=MOSFET, IdsMax_A=36A, LatestRevisionDate=2017-03-09, LatestRevisionNote="Added parts.", MountType=SMT, PackageReference=4.105x1.632mm, PartNumber=EPC2001C, Published=2008-06-19, Publisher="Texas Instruments", QgTyp_nC=7.5, RoHS=Y, SizeArea_mm2=6.69936, SizeAreaWB_mm2=13.43636, SizeX_mm=1.632, SizeY_mm=4.105, SizeZ_mm=0.815, Supplier 1=Digi-Key, U/M=EA, VdsMax_V=100V, Vgs_V=6V
R1 R2 R4 R8: library part CMP-0026992-3, "RES, 0, 5%, 0.1 W, AEC-Q200 Grade 0, 0402", Manufacturer=Panasonic, PartNumber=ERJ-2GE0R00X, Power_W=100mW, Supplier Part Number 1=P0.0JCT-ND, TempCo="600 ppm/C", Tolerance_%=5%, Value2=0.1W, Value_Code=0000, ValueDisplayed=0, AEC Category=Q200, AEC Grade=0, AEC Qualified=Y, ComponentLink1Description="Datasheet link", ComponentLink1URL=https://industrial.panasonic.com/cdbs/www-data/pdf/RDA0000/AOA0000C301.pdf, CompType=Resistor, EIA_Code=E24, MountType=SMT, PackageReference=0402, Res_ohm=0, RoHS=Y, SizeArea_mm2=0.5, SizeAreaWB_mm2=3, SizeX_mm=1, SizeY_mm=0.5, SizeZ_mm=0.6, Supplier 1=Digi-Key, Supplier 2=Newark, Supplier 3=Mouser, Supplier Part Number 2=65T8307, Supplier Part Number 3=667-ERJ-2GE0R00X, Technology="Thick Film", Value1=5%, VDC_V=50V
R3 R10: library part CMP-0027011-4, "RES, 0, 5%, 0.05 W, AEC-Q200 Grade 1, 0201", Manufacturer=Panasonic, PartNumber=ERJ-1GE0R00C, Power_W=50mW, Supplier Part Number 1=P0.0AGCT-ND, TempCo="600 ppm/C", Tolerance_%=5%, Value2=0.05W, Value_Code=0000, ValueDisplayed=0, AEC Category=Q200, AEC Grade=1, AEC Qualified=Y, ComponentLink1Description="Datasheet link", ComponentLink1URL=https://industrial.panasonic.com/cdbs/www-data/pdf/RDA0000/AOA0000C301.pdf, CompType=Resistor, EIA_Code=E24, MountType=SMT, PackageReference=0201, Res_ohm=0, RoHS=Y, SizeArea_mm2=0.18, SizeAreaWB_mm2=2.08, SizeX_mm=0.6, SizeY_mm=0.3, SizeZ_mm=0.26, Supplier 1=Digi-Key, Supplier 2=Newark, Supplier 3=Mouser, Supplier Part Number 2=53W4043, Supplier Part Number 3=667-ERJ-1GE0R00C, Technology="Thick Film", Value1=5%, VDC_V=15V
R6 R9: library part CMP-0026162-2, "RES, 20.0 k, 1%, 0.063 W, AEC-Q200 Grade 0, 0402", Manufacturer=Vishay-Dale, PartNumber=CRCW040220K0FKED, Power_W=63mW, Supplier Part Number 1=541-20.0KLCT-ND, TempCo="100 ppm/C", Tolerance_%=1%, Value2=0.063W, Value_Code=20k0, ValueDisplayed=20.0k, AEC Category=Q200, AEC Grade=0, AEC Qualified=Y, ComponentLink1Description="Datasheet link", ComponentLink1URL=http://www.vishay.com/docs/20035/dcrcwe3.pdf, CompType=Resistor, EIA_Code=E96, MountType=SMT, PackageReference=0402, Res_ohm=20k, RoHS=E, SizeArea_mm2=0.5, SizeX_mm=1, SizeY_mm=0.5, SizeZ_mm=0.6, Supplier 1=Digi-Key, Supplier 2=Newark, Supplier 3=Mouser, Supplier Part Number 2=52K6817, Supplier Part Number 3=71-CRCW0402-20K-E3, Technology="Thick Film", Value1=1%, VDC_V=50V
R7: library part CMP-0015203-2, "RES, 0.005, 1%, 1 W, 0612", Manufacturer="Susumu Co Ltd", Power_W=1W, Supplier Part Number 1=PRL1632.005FCT-ND, TempCo="350 ppm/C", Tolerance_%=1%, Value_Code=5L000, ValueDisplayed=0.005, AEC Category=Q200, AEC Qualified=?, ComponentLink1Description="Datasheet link", ComponentLink1URL=http://www.susumu-usa.com/common/pdf/PRL_RL_Data_sheet.pdf, CompType=Resistor, EIA_Code=E96, LatestRevisionDate=2017-03-09, MountType=SMT, PackageReference=0612, PartNumber=PRL1632-R005-F-T1, Published=2008-06-26, Publisher="Texas Instruments", Res_ohm=5m, RoHS=Y, SizeArea_mm2=5.12, SizeAreaWB_mm2=10.92, SizeX_mm=1.6, SizeY_mm=3.2, SizeZ_mm=0.85, Supplier 1=Digi-Key, Supplier 2=Mouser, Supplier 3=Farnell, Supplier Part Number 2=754-PRL1632-R005-FT1, Supplier Part Number 3=1266208, Technology="Thin Film", U/M=EA, Value1=1%, Value2=1W
R11 R12: library part CMP-0027269-3, "RES, 20.0 k, 1%, 0.05 W, 0201", Manufacturer=Vishay-Dale, PartNumber=CRCW020120K0FKED, Power_W=50mW, Supplier Part Number 1=541-20.0KAABCT-ND, TempCo="100 ppm/C", Tolerance_%=1%, Value2=0.05W, Value_Code=20k0, ValueDisplayed=20.0k, AEC Category=Q200, AEC Grade=N/A, AEC Qualified=N, ComponentLink1Description="Datasheet link", ComponentLink1URL=http://www.vishay.com/docs/20052/crcw0201e3.pdf, CompType=Resistor, EIA_Code=E96, MountType=SMT, PackageReference=0201, Res_ohm=20k, RoHS=E, SizeArea_mm2=0.18, SizeX_mm=0.6, SizeY_mm=0.3, SizeZ_mm=0.26, Supplier 1=Digi-Key, Supplier 2=Newark, Supplier 3=Mouser, Supplier Part Number 2=63R7663, Supplier Part Number 3=71-CRCW020120K0FKED, Technology="Thick Film", Value1=1%, VDC_V=30V
R13 R14: library part CMP-0002063-2, "TRIMMER 1M OHM 0.25W SMD", Manufacturer=Bourns, PartNumber=3224X-1-105E, Supplier Part Number 1=3224X-1-105ECT-ND, ComponentLink1Description="Datasheet URL", ComponentLink1URL=http://www.bourns.com/data/global/pdfs/3224.pdf, CompType=Trimmer, LatestRevisionDate=09/03/2017, MountType=SMT, PackageReference=3.5x5.3x4.8mm, Publisher="Texas Instruments", RoHS=Y, Supplier 1=Digi-Key, Supplier 2=Mouser, Supplier Part Number 2=652-3224X-1-105E
R15: library part CMP-0025729-4, "RES, 1.0 k, 5%, 0.1 W, AEC-Q200 Grade 0, 0603", Manufacturer=Vishay-Dale, PartNumber=CRCW06031K00JNEA, Power_W=100mW, Supplier Part Number 1=541-1.0KGCT-ND, TempCo="200 ppm/C", Tolerance_%=5%, Value2=0.1W, Value_Code=1k00, ValueDisplayed=1.0k, AEC Category=Q200, AEC Grade=0, AEC Qualified=Y, ComponentLink1Description="Datasheet link", ComponentLink1URL=http://www.vishay.com/docs/20035/dcrcwe3.pdf, CompType=Resistor, EIA_Code=E24, MountType=SMT, PackageReference=0603, Res_ohm=1k, RoHS=E, SizeArea_mm2=1.28, SizeX_mm=1.6, SizeY_mm=0.8, SizeZ_mm=1, Supplier 1=Digi-Key, Supplier 2=Newark, Supplier 3=Mouser, Supplier Part Number 2=59M6750, Supplier Part Number 3=71-CRCW0603J-1.0K-E3, Technology="Thick Film", Value1=5%, VDC_V=75V
R16: library part CMP-0018574-3, "RES, 100 k, 5%, 0.25 W, AEC-Q200 Grade 0, 1206", Manufacturer=Vishay-Dale, PartNumber=CRCW1206100KJNEA, Power_W=250mW, Supplier Part Number 1=541-100KECT-ND, TempCo="200 ppm/C", Tolerance_%=5%, Value2=0.25W, Value_Code=100k, AEC Category=Q200, AEC Grade=0, AEC Qualified=Y, ComponentLink1Description="Datasheet link", ComponentLink1URL=http://www.vishay.com/docs/20035/dcrcwe3.pdf, CompType=Resistor, EIA_Code=E24, MountType=SMT, PackageReference=1206, Res_ohm=100k, RoHS=E, SizeArea_mm2=5.12, SizeX_mm=3.2, SizeY_mm=1.6, SizeZ_mm=1.35, Supplier 1=Digi-Key, Supplier 2=Newark, Supplier 3=Farnell, Supplier Part Number 2=59M6947, Supplier Part Number 3=1534576, Technology="Thick Film", Value1=5%, ValueDisplayed=100k, VDC_V=200V
SH-J1: library part CMP-0003623-1, "Shunt, 100mil, Gold plated, Black", Alternate Manufacturer=3M, Alternate PartNumber=969102-0000-DA, Manufacturer=Samtec, Supplier Part Number 1=SNT-100-BK-G-ND, ClassName=Shunt, ComponentLink1Description="Datasheet Link", ComponentLink1URL=http://www.samtec.com/ftppub/pdf/SNT.PDF, CompType=Shunt, Key=SNT-100-BK-G, LatestRevisionDate=2017-03-09, MountType=N/A, Note="You can \"mate\" this to a header by matching the designator.  i.e. use SH-J3 for header J3", PackageReference=Shunt, PartNumber=SNT-100-BK-G, Publisher="Texas Instruments", RoHS=Y, Supplier 1=Digi-Key
TP1: library part CMP-0055146-1, "Test Point, Compact, Yellow, TH", Color=Yellow, Manufacturer=Keystone, Supplier Part Number 1=36-5009-ND, CNHeader=FALSE, ComponentLink1Description="Datasheet URL", ComponentLink1URL=http://www.keyelco.com/userAssets/file/M60-2p60.pdf, CompType="Test Point", ContactFinish=Silver, CT=TRUE, Green_EU RoHS=Passed, Green_EU RoHS-2=Incomplete, Green_Lifecycle=Active, Green_REACh=Passed, LatestRevisionDate=26/05/2017, MountType=TH, PackageReference="Yellow Compact Testpoint", PartNumber=5009, Publisher="Texas Instruments", RoHS=Y, Supplier 1=Digi-Key, Supplier 2=Mouser, Supplier Part Number 2=534-5009
TP2: library part CMP-0055142-1, "Test Point, Compact, Red, TH", Color=Red, Manufacturer=Keystone, Supplier Part Number 1=36-5005-ND, CNHeader=FALSE, ComponentLink1Description="Datasheet URL", ComponentLink1URL=http://www.keyelco.com/userAssets/file/M60-2p60.pdf, CompType="Test Point", ContactFinish=Silver, CT=TRUE, Green_EU RoHS=Passed, Green_EU RoHS-2=Passed, Green_Lifecycle=Active, Green_REACh=Passed, LatestRevisionDate=26/05/2017, MountType=TH, PackageReference="Red Compact Testpoint", PartNumber=5005, Publisher="Texas Instruments", RoHS=Y, Supplier 1=Digi-Key, Supplier 2=Mouser, Supplier Part Number 2=534-5005
TP3 TP5 TP8 TP9 TP11 TP12: library part CMP-0003907-1, "PIGTAIL", Manufacturer="Texas Instruments", PartNumber=TESTPOINT_PIGTAIL, ComponentLink1Description="Datasheet Link", CompType="Test Point", Key=TESTPOINT_PIGTAIL, LatestRevisionDate=2017-03-09, MountType=TH, PackageReference="Pigtail Test Point", Publisher="Texas Instruments"
TP4 TP7 TP13: library part CMP-0055143-1, "Test Point, Compact, Black, TH", Color=Black, Manufacturer=Keystone, Supplier Part Number 1=36-5006-ND, CNHeader=FALSE, ComponentLink1Description="Datasheet URL", ComponentLink1URL=http://www.keyelco.com/userAssets/file/M60-2p60.pdf, CompType="Test Point", ContactFinish=Silver, CT=TRUE, Green_EU RoHS=Passed, Green_EU RoHS-2=Incomplete, Green_Lifecycle=Active, Green_REACh=Passed, LatestRevisionDate=26/05/2017, MountType=TH, PackageReference="Black Compact Testpoint", PartNumber=5006, Publisher="Texas Instruments", RoHS=Y, Supplier 1=Digi-Key, Supplier 2=Mouser, Supplier Part Number 2=534-5006
TP6 TP10: library part CMP-0055137-1, "Test Point, Miniature, Red, TH", Color=Red, Manufacturer=Keystone, PartNumber=5000, Supplier Part Number 1=36-5000-ND, CNHeader=FALSE, ComponentLink1Description="Datasheet URL", ComponentLink1URL=http://www.keyelco.com/userAssets/file/M60-2p60.pdf, CompType="Test Point", ContactFinish=Silver, CT=TRUE, Green_EU RoHS=Passed, Green_EU RoHS-2=Incomplete, Green_Lifecycle=Active, Green_REACh=Passed, LatestRevisionDate=26/05/2017, MountType=TH, PackageReference="Red Miniature Testpoint", Publisher="Texas Instruments", RoHS=Y, Supplier 1=Digi-Key, Supplier 2=Mouser, Supplier Part Number 2=534-5000
U1: library part CMP-0014092-2, "Advanced eGaN FET 300V Half-bridge Drive, RVR0019A (WQFN-19)", Alternate Manufacturer="Texas Instruments", PartNumber=LMG1210RVR, ComponentLink1Description="Datasheet Link", ComponentLink1URL=https://sps06.itg.ti.com/sites/KMS/crossdivteams/altium/docs/ComponentDatasheets/LMG1210_SNOSD12.pdf, CompType=IC, LatestRevisionDate=2017-03-09, Manufacturer="Texas Instruments", MountType=SMT, PackageDescription=WQFN-19, PackageReference=RVR0019A, Publisher="Texas Instruments", SizeArea_mm2=12, SizeAreaWB_mm2=20, SizeX_mm=4, SizeY_mm=3, SizeZ_mm=0.8, U/M=EA
U2: library part CMP-0051898-1, "Dual Schmitt-Trigger Buffer, DBV0006A, LARGE T&R", F @ Nom Voltage(Max)(Mhz)=150, Generic Part Number=SN74LVC2G17, ICC @ Nom Voltage(Max)(mA)=0.01, Manufacturer="Texas Instruments", Operating Temperature Range(C)="-40 to 125,-40 to 85", Rating=Catalog, tpd @ Nom Voltage(Max)(ns)=9.3,5.7,5.4,4.3, Voltage(Nom)(V)=1.8,2.5,3.3,5, 3-State Output=No, Bits(#)=2, DatasheetVersion=SCES381N, Input Type=CMOS/TTL, Logic=True, Output Drive (IOL/IOH)(Max)(mA)=32/-32, Output Type=CMOS, PackageReference=DBV0006A, PartId=2, Schmitt Trigger=Yes, Sub-Family="Non-Inverting Buffer/Driver", Technology Family=LVC, VCC(Max)(V)=5.5, VCC(Min)(V)=1.65
ZZ2: library part CMP-0077236-1, ClassName=AssemblyNote, CompType=AssemblyNote, Key=AssemblyNote, LatestRevisionDate=2017-08-10, Publisher="Texas Instruments"
ZZ3: library part CMP-0077237-1, ClassName=AssemblyNote, CompType=AssemblyNote, Key=AssemblyNote, LatestRevisionDate=2017-08-10, Publisher="Texas Instruments"
ZZ4: library part CMP-0077238-1, ClassName=AssemblyNote, CompType=AssemblyNote, Key=AssemblyNote, LatestRevisionDate=2017-08-10, Publisher="Texas Instruments"

## Via types
v1: diameter 24, hole 12, Top Layer to Bottom Layer, tented both sides, 110 vias
v2: diameter 17, hole 7, Top Layer to Bottom Layer, tented both sides, 71 vias
v3: diameter 22, hole 12, Top Layer to Bottom Layer, tented both sides, 6 vias
v4: diameter 19.68, hole 7.87, Top Layer to Bottom Layer, 4 vias

## Nets (pads, with @x,y where several pads share a name; then routed paths per layer and width w, separated by ;. In a path a pad name is that pad's centre, name@x,y a point inside that pad or via, vN(x,y) a via of type N, cw(c..) or ccw(c..) an arc to the next point about the centre after c; other vN are vias at no path point)
5V_VCC: C1.1 C2.1 C2.2 C13.1 J3.2 J6.1 R15.1 TP1.1 U1.4 U2.5 | length 2341.2
  Top Layer w10: R15.1@101,1719 216,1604 J3.2@286,1604 ; J3.2@281,1609 326.51,1563.49 326.51,1469.35 310,1452.83 310,1026.5 316.5,1020 v2@350,1020 ; TP1.1@461,524 439.29,545.71 439.29,760.38 v2(501,822.09) ; C2.1@503.5,843 501,840.5 v2(501,822.09) ; U1.4@568.58,904.2 U1.4@568.58,904.62 ; 568.68,868.81 568.68,876.13 ; U1.4@568.68,904.2 568.68,876.13 ; v2(501,822.09) 502.4,822.09 515.11,809.38 554.89,809.38 566.5,820.98 C2.2@566.5,843 566.5,873.94 568.68,876.13
  Top Layer w12: C13.1@303,1020 303,940 314,929 U2.5@346.13,929
  Bottom Layer w10: v2@349,1021.74 v2(349,1021) 349,999 368,980 380.87,980 392,968.87 392,956 453.36,894.64 C1.1@453.36,824.06 ; TP1.1@461,524 476,539 853.29,539 918.29,474 J6.1@961,474 ; C1.1@475,821.09 500,821.09 v2(501,822.09)
11: U1.11
15: U1.15
EN: R1.2 R2.1 TP8.1 U2.6 | length 313.5
  Top Layer w12: U2.6@346.13,966.4 351.54,961 v2(373,961) R2.1@397.38,961